# Altium PCB 推挽Max.PcbDoc
Units mil, origin at the board's own origin, x right, y up, seen from the top; angles counter-clockwise.
Board outline 5085 x 1741 mil, 2 copper layers (Top Layer, Bottom Layer); 48 components, 41 nets, 194 pads, 16 vias.
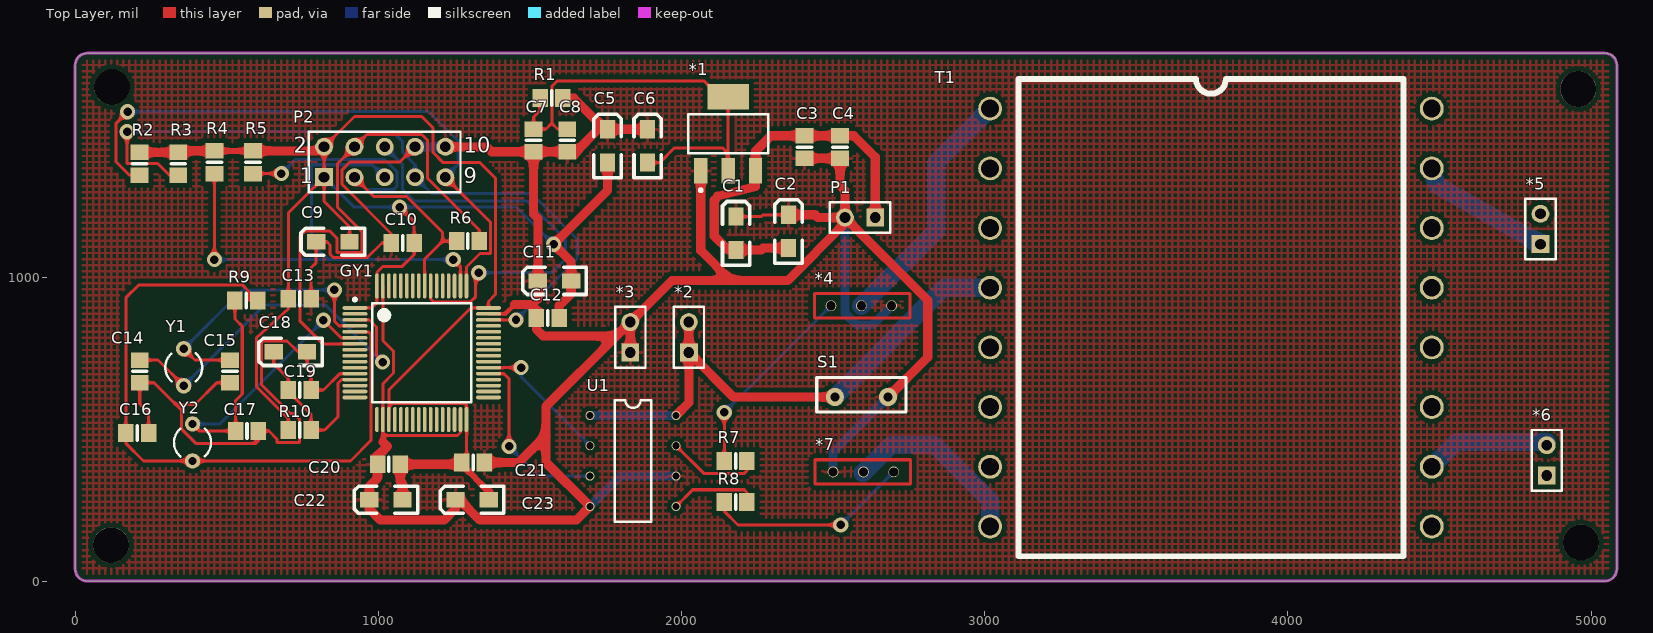
[diagram p0: Top Layer view]
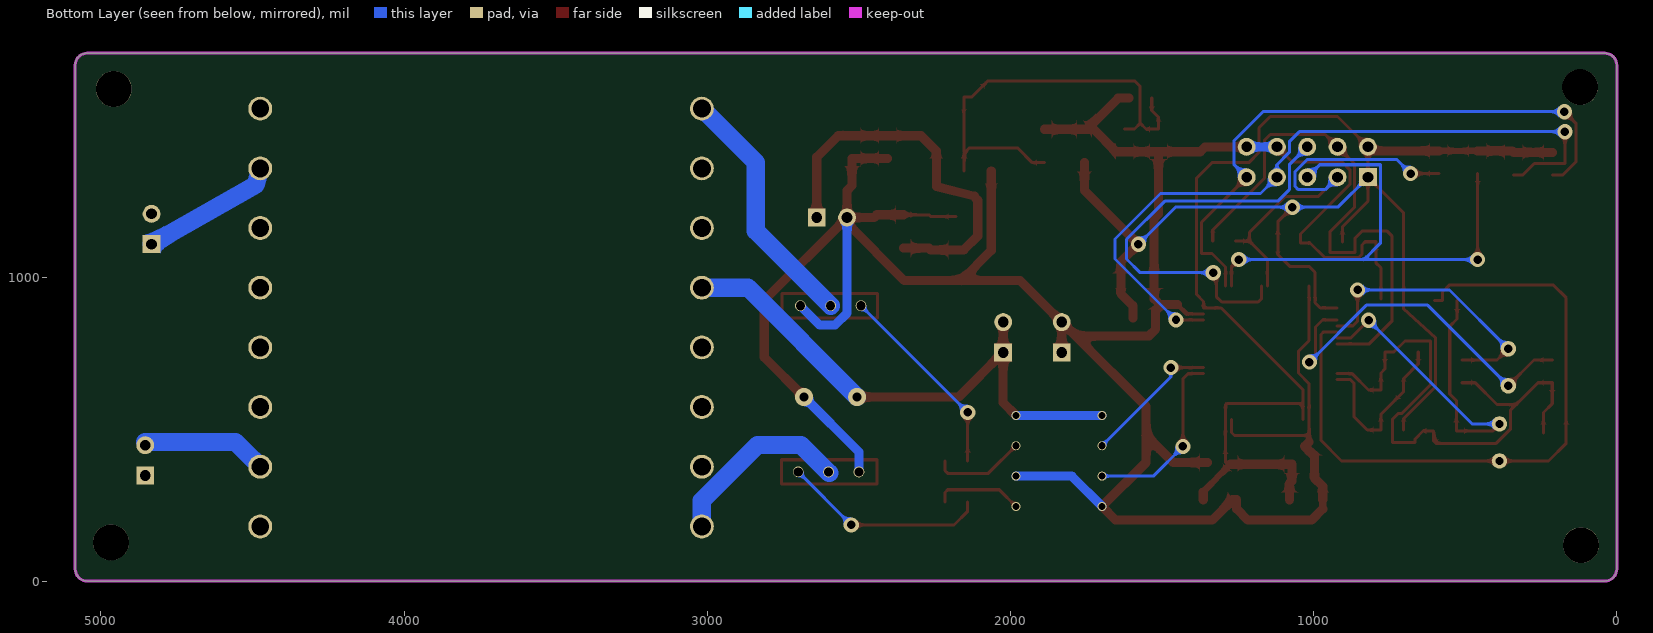
[diagram p1: Bottom Layer view, seen from below]

## Layer stack, top to bottom
Top Solder: solder mask 0.4, Solder Resist, Dk 3.5
Top Layer: signal copper 1.4
Dielectric 1: dielectric 12.6, FR-4, Dk 4.8
Bottom Layer: signal copper 1.4
Bottom Solder: solder mask 0.4, Solder Resist, Dk 3.5

## Board outline
0,39.37 ccw(c39.37,39.37) 39.37,0 5045.63,0 ccw(c5045.63,39.37) 5085,39.37 5085,1701.61 ccw(c5045.62,1701.62) 5045.63,1741 39.37,1741 ccw(c39.38,1701.62) 0,1701.61

## Design rules (kind name [scope] priority, off if disabled: settings)
Clearance poly [inPolygon] p1: gap=15
Clearance [All] p2: gap=6
PolygonConnect Via [isVia] p1: connectstyle=Direct reliefconductorwidth=10 reliefentries=4 polygonreliefangle="90 Angle" airgapwidth=10
PolygonConnect [All] p2: connectstyle=Relief reliefconductorwidth=10 reliefentries=4 polygonreliefangle="90 Angle" airgapwidth=10
RoomDefinition aaa [InComponentClass('aaa')] p1: confinementstyle=ConfineIn formatcopy=TRUE lockcomponents=FALSE outline -69961,-36858 -67961,-36858 -67961,-35858 -69961,-35858
RoutingVias [All] p1: holewidth=28 width=50 viastyle="Through Hole" minholewidth=28 minwidth=50 maxholewidth=28 maxwidth=50
SolderMaskExpansion [All] p1: expansion=2.5
Width [All] p1: maxlimit=10 minlimit=7 preferedwidth=10
30 further rules are at their usual default settings.

## Components (designator, comment, footprint, x,y, rotation, side; value= is the part's Value field where it differs from the comment)
*1 "LM1117" sot223 2154,1475 r0 top
*2 "Component_1" HDR1X2 2024,754 r90 top
*3 "Component_1" HDR1X2 1831,754 r90 top
*4 "MOS" PCBComponent_1 52293,50758 r0 top
*5 "Component_1" HDR1X2 4833,1111 r90 top
*6 "Component_1" HDR1X2 4854,348 r90 top
*7 "MOS" PCBComponent_1 -47100,-49490 r180 top
C1 "Cap Pol2" 3216 2180,1202 r90 top
C2 "Cap Pol2" 3216 2353,1208 r90 top
C3 "Cap Semi" 2012 2405,1394 r90 top
C4 "Cap Semi" 2012 2523,1394 r90 top
C5 "Cap Pol2" 3216 1756,1490 r90 top
C6 "Cap Pol2" 3216 1888,1490 r90 top
C7 "Cap Semi" 2012 1512,1416 r90 top
C8 "Cap Semi" 2012 1623,1416 r90 top
C9 "Cap Pol2" 3216 795,1119 r180 top
C10 "Cap Semi" 2012 1118,1115 r180 top
C11 "Cap Pol2" 3216 1526,990 r180 top
C12 "Cap Semi" 2012 1596,867 r180 top
C13 "Cap" 2012 778,931 r180 top
C14 "Cap" 2012 213,654 r90 top
C15 "Cap" 2012 510,654 r90 top
C16 "Cap" 2012 242,488 r180 top
C17 "Cap" 2012 604,495 r180 top
C18 "Cap" 3216 655,756 r180 top
C19 "Cap" 2012 778,630 r180 top
C20 "Cap Semi" 2012 1072,385 r180 top
C21 "Cap Semi" 2012 1275,391 r0 top
C22 "Cap Pol2" 3216 970,268 r180 top
C23 "Cap Pol2" 3216 1254,268 r180 top
GY1 "STM32F103RC" LQFP64_M 1143,753 r0 top
P1 "Header 2" HDR1X2 2639,1199 r180 top
P2 "JTAG" HDR2X5 821,1332 r0 top
R1 "Res2" 2012 1534,1593 r0 top
R2 "Res2" 2012 212,1339 r90 top
R3 "Res2" 2012 340,1339 r90 top
R4 "Res2" 2012 459,1344 r90 top
R5 "Res2" 2012 587,1344 r90 top
R6 "Res2" 2012 1258,1121 r0 top
R7 "Res2" 2012 2141,396 r0 top
R8 "Res2" 2012 2141,260 r0 top
R9 "Res2" 2012 527,925 r0 top
R10 "Res2" 2012 778,498 r180 top
S1 "SORCE" ddd2 2591,617 r0 top
T1 "Trans CT" bby 3018,1558 r0 top
U1 "IR2101" IR2101 1698,546 r0 top
Y1 "32.768K" R38 358,705 r0 top
Y2 "8MHZ" R38 387,457 r0 top

## Footprints (in the part's own frame and the unit in brackets; to place one, negate y for a bottom-side part, rotate by r counter-clockwise, add the part's x,y. Pads: shape width x height; smd on the part's side, far side on the other; paste and mask are expansions set on the pad)
2012 [mm]
  rect 1.3x1.5 smd: 1(0,0) 2(1.9,0)
  silkscreen extent 0.95,-0.6 0.95,0.6
3216 [mil]
  rect 60x50 smd: 1(0,0) 2(-110,0)
  silkscreen extent -160,-45 50,45
bby [mm]
  round 2 hole 1.5: 1(0,0) 2(0,-5) 3(0,-10) 4(0,-15) 5(0,-20) 6(0,-25) 7(0,-30) 8(0,-35) 9(37,-35) 10(37,-30) 11(37,-25) 12(37,-20) 13(37,-15) 14(37,-10) 15(37,-5) 16(37,0)
  silkscreen extent 2.39,-37.5 34.62,2.5
ddd2 [mil]
  round 60 hole 30: 1(-85,-10) 2(90,-10)
  silkscreen extent -145,-60 150,55
HDR1X2 [mm] "Connector; Header; 2 Position"
  rect 1.5x1.5 hole 0.9: 1(0,0)
  round 1.5 hole 0.9: 2(2.54,0)
  silkscreen extent -1.27,-1.27 3.81,1.27
HDR2X5 [mm] "Connector; Header; 5x2 Position"
  rect 1.5x1.5 hole 0.9: 1(0,0)
  round 1.5 hole 0.9: 2(0,2.54) 3(2.54,0) 4(2.54,2.54) 5(5.08,0) 6(5.08,2.54) 7(7.62,0) 8(7.62,2.54) 9(10.16,0) 10(10.16,2.54)
  silkscreen extent -1.27,-1.27 11.43,3.81
IR2101 [mm]
  round 0.75 hole 0.6: 1(0,0) 2(0,-2.54) 3(0,-5.08) 4(0,-7.62) 5(7.21,-7.62) 6(7.21,-5.08) 7(7.21,-2.54) 8(7.21,0)
  silkscreen extent 2.08,-8.89 5.13,1.27
LQFP64_M [mm]
  oval 2.1x0.3 smd: 1(-5.6,3.75) 2(-5.6,3.25) 3(-5.6,2.75) 4(-5.6,2.25) 5(-5.6,1.75) 6(-5.6,1.25) 7(-5.6,0.75) 8(-5.6,0.25) 9(-5.6,-0.25) 10(-5.6,-0.75) 11(-5.6,-1.25) 12(-5.6,-1.75) 13(-5.6,-2.25) 14(-5.6,-2.75) 15(-5.6,-3.25) 16(-5.6,-3.75) 33(5.6,-3.75) 34(5.6,-3.25) 35(5.6,-2.75) 36(5.6,-2.25) 37(5.6,-1.75) 38(5.6,-1.25) 39(5.6,-0.75) 40(5.6,-0.25) 41(5.6,0.25) 42(5.6,0.75) 43(5.6,1.25) 44(5.6,1.75) 45(5.6,2.25) 46(5.6,2.75) 47(5.6,3.25) 48(5.6,3.75)
  oval 0.3x2.1 smd: 17(-3.75,-5.6) 18(-3.25,-5.6) 19(-2.75,-5.6) 20(-2.25,-5.6) 21(-1.75,-5.6) 22(-1.25,-5.6) 23(-0.75,-5.6) 24(-0.25,-5.6) 25(0.25,-5.6) 26(0.75,-5.6) 27(1.25,-5.6) 28(1.75,-5.6) 29(2.25,-5.6) 30(2.75,-5.6) 31(3.25,-5.6) 32(3.75,-5.6) 49(3.75,5.6) 50(3.25,5.6) 51(2.75,5.6) 52(2.25,5.6) 53(1.75,5.6) 54(1.25,5.6) 55(0.75,5.6) 56(0.25,5.6) 57(-0.25,5.6) 58(-0.75,5.6) 59(-1.25,5.6) 60(-1.75,5.6) 61(-2.25,5.6) 62(-2.75,5.6) 63(-3.25,5.6) 64(-3.75,5.6)
  silkscreen extent -5.72,-4.15 4.15,4.57
PCBComponent_1 [mm]
  round 0.9 hole 0.762: 1(-1264.92,-1266.19)
  round 0.91 hole 0.762: 2(-1262.38,-1266.19) 3(-1259.84,-1266.19)
  Top Layer lines w0.254: -1266.317,-1267.206 -1258.316,-1267.206 -1258.316,-1265.174 -1266.317,-1265.174 -1266.317,-1267.206
R38 [mm] "Crystal, Thru-Hole; 2 Leads; Body 3.1 x 8.2 mm (Dia.xH)"
  round 1.3 hole 0.7: 1(0,1.55) 2(0,-1.55)
  silkscreen extent -1.55,-1.19 1.55,1.17
sot223 [mm]
  rect 1.1x2.15 smd: 1(-2.3,-3.1) 2(0,-3.1) 3(2.3,-3.1)
  rect 3.5x2.15 smd: 4(0,3.1)
  silkscreen extent -3.35,-4.85 3.35,1.62

## Part data
C1 C2 C5 C6 C9 C11 C22 C23: "Polarized Capacitor (Axial)"
C3 C4 C7 C8 C10 C12 C20 C21: "Capacitor (Semiconductor SIM Model)"
C13 C14 C15 C16 C17 C18 C19: "Capacitor"
P1: "Header, 2-Pin"
P2: library part "Header 5X2", "Header, 5-Pin, Dual row"
R1 R2 R3 R4 R5 R6 R7 R8 R9 R10: "Resistor"
T1: "Center-Tapped Transformer (Coupled Inductor Model)"
Y1 Y2: library part XTAL, "Crystal Oscillator"

## Free pads (board coordinates)
  round 118.11 hole 118.11 unplated: 2(118.11,118.11) 2(121,1629) 2(4957.89,1622.89) 2(4966.89,127.11)

## Via types
v1: diameter 50, hole 28, Top Layer to Bottom Layer, 16 vias

## Nets (pads, with @x,y where several pads share a name; then routed paths per layer and width w, separated by ;. In a path a pad name is that pad's centre, name@x,y a point inside that pad or via, vN(x,y) a via of type N, cw(c..) or ccw(c..) an arc to the next point about the centre after c; other vN are vias at no path point)
15V: *2.1 *2.2 S1.1 T1.4 U1.1 U1.8 | length 1813.5
  Top Layer w30: U1.8 2024,588.14 *2.1 ; *2.2 *2.1 ; S1.1 2171,607 *2.1
  Bottom Layer w30: U1.1 U1.8
  Bottom Layer w60: S1.1 2866.45,967.45 T1.4
BOOT0: GY1.60
BOOT1: GY1.28
GND: *1.1 *3.1 *3.2 *4.3 *7.3 C1.1 C2.1 C3.1 C4.1 C5.1 C6.1 C7.1 C8.1 C9.1 C10.2 C11.1 C12.2 C13.1 C20.2 C21.2 C22.1 C23.1 GY1.18 GY1.31 GY1.47 GY1.63 P1.2 P2.8 P2.10 R1.2 S1.2 U1.4 U1.6 | length 10048.1
  Top Layer w10: C13.1 778,1033 795,1050 C9.1 830,1119 840.67,1108.33 840.67,1078 851.67,1067 963.74,1067 1011.74,1115 C10.2 1043.2,1144.8 880.47,1307.53 880.47,1356.47 906,1382 1071,1382 P2.8 ; 1015.05,458.95 GY1.18 1015.05,650.95 1050,685.9 1050,758 1015.05,792.95 GY1.63 ; 1015.05,480 1261,480 1270.95,489.95 GY1.31 ; GY1.47 1418.66,880.95 ; C1.1 2263,1202 2269,1208 C2.1 ; P1.2@2539,1180 P1.2
  Top Layer w15: 1418.66,880.95 1449.7,912
  Top Layer w20: 970,238 C22.1
  Top Layer w30: 970,238 1007,201 1217,201 1254,238 C23.1 1268,268 1335,201 1653,201 U1.4 1553,391 1553,481 ; C22.1 970,312 997.2,339.2 C20.2 997.2,412.24 1029.48,444.52 1015.05,458.95 ; P2.10 1358,1432 1374,1416 C7.1 ; C21.2 1463,391 1553,481 ; 1449.7,912 1501,912 1521.2,891.8 C12.2 1521.2,830.8 1543,809 1784.75,807.75 ; 1502.1,906.9 1526,930.8 C11.1 1526,1196 1512,1210 C7.1 ; R1.2 1645,1593 1749,1489 C5.1@1764,1489 ; *3.1 *3.2 ; C6.1 C5.1 1726,1490 1652,1416 C8.1 C7.1 ; *1.1 2063.45,1090.55 2163,991 ; C2.1 2441,1208 2450,1199 P1.2 ; C3.1 C4.1 2523,1304 2539,1288 P1.2 ; P1.2@2539,1180 2350,991 2163,991 ; S1.2 2812,738 2812,926 P1.2 ; 1553,481 1553,576 1784.75,807.75 ; 1784.75,807.75 *3.2 ; *3.2 1968,991 2163,991
  Bottom Layer w30: P2.8 P2.10 ; U1.4 1798,346 U1.6 ; *7.3 2500,426 S1.2 ; P1.2 2539,884 2579,844 2629,844 *4.3
IN1: *4.1 R7.1 | length 657.8
  Top Layer w10: R7.1 v1(2141,556)
  Bottom Layer w10: v1(2141,556) *4.1
IN2: *7.1 R8.1 | length 680.1
  Top Layer w10: R8.1 2141,230 2186,185 v1(2525,185)
  Bottom Layer w10: v1(2525,185) *7.1
JNTRST: GY1.56 P2.3 R5.1 R6.1 | length 1334.5
  Top Layer w10: R5.1 v1(680,1344) ; P2.3 984,1269 1093,1269 1211.84,1150.16 1211.84,1121 ; GY1.56 1152.84,1062 1211.84,1121 ; R6.1 1211.84,1121
  Bottom Layer w10: v1(680,1344) 727,1391 1020.53,1391 1061.53,1350 1061.53,1302 1050.53,1291 962,1291 P2.3
JTCK: GY1.49 P2.9 R2.1 | length 2016.5
  Top Layer w10: v1(173,1548) 135,1510 135,1382 178,1339 R2.1 ; P2.9 1370,1183 1370,1080 1335,1080 1290.64,1035.64 GY1.49
  Bottom Layer w10: v1(173,1548) 1167,1548 1262,1453 1262,1373 P2.9
JTD0: GY1.55 P2.6 | length 1426.4
  Top Layer w10: GY1.55 1172.53,930.47 1183,920 1303,920 1321,938 1321,1007 v1(1331,1017)
  Bottom Layer w10: P2.6 1080,1373 1080,1291 1118,1253 1491,1253 1617,1127 1617,1062 1572,1017 v1(1331,1017)
JTD1: GY1.50 P2.5 R4.1 | length 1761.8
  Top Layer w10: v1(459,1060) R4.1 ; v1(1247,1060) 1270.95,1036.05 GY1.50
  Bottom Layer w10: v1(459,1060) 834,1060 ; P2.5 980,1373 780,1373 780,1114 834,1060 ; v1(1247,1060) 834,1060
JTMS: GY1.46 P2.7 R3.1 | length 2405.6
  Top Layer w10: v1(171,1482) 171,1377 272,1377 310,1339 R3.1 ; GY1.46 v1(1454,861.27)
  Bottom Layer w10: v1(171,1482) 1047,1482 1080,1449 1080,1414 1121,1373 P2.7 1175,1278 1505.27,1278 1655,1128.27 1655,1062.27 v1(1454,861.27)
Net*1_2: *1.2 *1.4 C6.2 C7.2 C8.2 R1.1 | length 1567.8
  Top Layer w10: R1.1 1534,1552 1512,1530 C7.2 1552.8,1490.8 1572,1510 ; C8.2 1591,1490.8 1572,1509.8 1572,1510 ; C6.2 1928,1380 1977,1429 2135,1429 2151,1413 ; 1572,1510 1572,1631 1591,1650 2074.05,1650 2127,1597.05 *1.4 2154,1416 2151,1413 ; 2151,1413 2154,1410 *1.2 2151,1413
Net*4_2: *4.2 T1.1 | length 826
  Bottom Layer w60: *4.2 2840,1155 2840,1380 T1.1
Net*5_1: *5.1 T1.15 | length 451.7
  Bottom Layer w60: T1.15 4489.99,1306.14 *5.1@4833.61,1112.08
Net*6_2: *6.2 T1.10 | length 417.1
  Bottom Layer w10: T1.10@4461.57,399.51 T1.10@4497.3,399.51
  Bottom Layer w60: T1.10@4497.3,399.51 4556.79,459 *6.2@4854,459
Net*7_2: *7.2 T1.8 | length 619.7
  Bottom Layer w60: *7.2@2598,356 2691,449 2834,449 3018,265 T1.8
NetC14_1: C14.1 C15.1 C16.1 C17.1 C18.2 C19.1 GY1.12 | length 1990.7
  Top Layer w10: C16.1 242,556 213,585 C14.1 260,654 332,582 ; C15.1 467,654 395,582 332,582 ; GY1.12 873.1,684.1 819,630 C19.1 778,686 765,699 C18.2 735,756 699,792 614,792 614,648 710,552 722,552 740,534 740,457 666,457 666,468 639,495 C17.1 ; 332,582 350,564 350,502 398,454 596,454 ; 596,454 604,462 C17.1 ; 596,454 C17.1
NetC18_1: C18.1 C19.2 GY1.13 R10.1 | length 587.1
  Top Layer w10: C18.1 655,716.2 703.2,668 C19.2 703.2,624.8 778,550 R10.1 823,498 867.56,542.56 867.56,652.98 879,664.42 GY1.13
NetR7_2: R7.2 U1.7 | length 307.5
  Top Layer w10: U1.7 2072.86,355 2207,355 2215.8,363.8 R7.2
NetR8_2: R8.2 U1.5 | length 292.6
  Top Layer w10: U1.5 2036.86,301 2207,301 2215.8,292.2 R8.2
PA0: GY1.14
PA1: GY1.15
PB5: GY1.57
PB6: GY1.58
PB7: GY1.59
PB8: GY1.61
PB9: GY1.62
PC6: GY1.37 U1.3 | length 605.3
  Top Layer w10: GY1.37 1414.1,684.1 1431,667.2 v1(1431,444)
  Bottom Layer w10: v1(1431,444) 1529,346 U1.3
PC7: GY1.38 U1.2 | length 459.3
  Top Layer w10: GY1.38 v1(1471,703.79)
  Bottom Layer w10: v1(1471,703.79) 1471,673 U1.2
PC10: GY1.51
PC11: GY1.52
PC12: GY1.53
PC13: GY1.2
PC14: C14.2 GY1.3 Y1.2 | length 1229.6
  Top Layer w10: C14.2 273.17,728.8 Y1.2 ; GY1.3 970.73,861.27 994,838 994,742 v1(1014,722)
  Bottom Layer w10: Y1.2 624.02,910 826,910 v1(1014,722)
PC15: C15.2 GY1.4 Y1.1 | length 921.9
  Top Layer w10: Y1.1 395.22,728.8 C15.2 ; v1(855,960) 855,856.58 870,841.58 GY1.4
  Bottom Layer w10: Y1.1 551.98,960 v1(855,960)
PD0: C16.2 GY1.5 R9.2 Y2.2 | length 2237.5
  Top Layer w10: R9.2 575,925 575,953 551,977 210.2,977 167.2,934 C16.2 167.2,454 225.22,395.98 Y2.2 907.98,395.98 976,464 976,812.9 967,821.9 GY1.5
PD1: C17.2 GY1.6 R9.1 Y2.1 | length 1302
  Top Layer w10: Y2.1 410.02,495 C17.2 529.2,595.2 551,617 551,840 527,864 R9.1 ; v1(819,860.21) 877,802.21 GY1.6
  Bottom Layer w10: Y2.1 476.81,518.02 v1(819,860.21)
PD2: GY1.54
RESET: GY1.7 P2.4 R6.2 | length 1837.3
  Top Layer w10: GY1.7 816.62,782.53 741,858.14 741,1137 759,1155 839,1155 864,1130 864,1083 946,1083 946,1152 864.47,1233.53 864.47,1375.47 P2.4 962,1473 1143,1473 1162,1454 1162,1328.8 1332.8,1158 R6.2
VCC_3.3: C5.2 C9.2 C10.1 C11.2 C12.1 C13.2 C20.1 C21.1 C22.2 C23.2 GY1.1 GY1.19 GY1.32 GY1.48 GY1.64 P2.1 P2.2 R2.2 R3.2 R4.2 R5.2 R10.2 | length 6583.2
  Top Layer w10: R10.2 703.2,535.8 598,641 598,802.59 703.2,897.59 C13.2 703.2,1214.2 P2.1 ; C9.2 905,1168.71 821,1252.71 P2.1 ; GY1.1 978,900.64 995.36,918 GY1.64 995.36,1018.36 1015,1038 1079,1038 1118,1077 C10.1 1118,1185 v1(1070,1233) ; GY1.19 1034.73,574 ; C21.1@1275,385 C21.1 1291,391 1291,492.64 1290.64,493 GY1.32 1290.64,582 1286.54,586.1 1046.83,586.1 1034.73,574 ; GY1.48 GY1.48@1363,900.64 ; P2.1 P2.2 921,1532 1143,1532 1180,1495 1180,1414 1214,1380 1335,1380 1386,1329 1386,945 1363,922 GY1.48@1363,900.64 ; 1034.73,574 1034.73,630.37 1305,900.64 GY1.48@1363,900.64
  Top Layer w20: R4.2 R5.2 ; C21.1@1275,385 1364,294
  Top Layer w30: R2.2 R3.2 345,1418.8 R4.2 ; R5.2 807.8,1418.8 P2.2 ; C22.2 1080,322 1072,330 C20.1 C21.1@1275,385 ; C23.2 1364,294 ; C12.1 1596,908 1636,948 C11.2 1636,1053 v1(1578,1111) 1756,1289 C5.2
  Bottom Layer w10: P2.1 920,1233 v1(1070,1233) 1456,1233 v1(1578,1111)
VCC_5: *1.3 C1.2 C2.2 C3.2 C4.2 P1.1 | length 1293.3
  Top Layer w30: 2108,1256 2108,1138 2154,1092 C1.2 2263,1092 2269,1098 C2.2 ; 2109,1254 2118.03,1269.22 2244.55,1301.52 *1.3 2244.55,1418.36 2295,1468.8 C3.2 C4.2 2568.2,1468.8 2639,1398 P1.1
pads on no net: *5.2 *6.1 GY1.8 GY1.9 GY1.10 GY1.11 GY1.16 GY1.17 GY1.20 GY1.21 GY1.22 GY1.23 GY1.24 GY1.25 GY1.26 GY1.27 GY1.29 GY1.30 GY1.33 GY1.34 GY1.35 GY1.36 GY1.39 GY1.40 GY1.41 GY1.42 GY1.43 GY1.44 GY1.45 T1.2 T1.3 T1.5 T1.6 T1.7 T1.9 T1.11 T1.12 T1.13 T1.14 T1.16

## Polygon pours and split planes (outlines as drawn)
GND on Top Layer "Top Layer-No Net" (hatched 90Degree grid 20 track 8, remove dead copper, pour order 12): 15,1743 23,1735 5057,1735 5057,31 5071,17 5068,14 15,14 15,1724 11,1728

## Keep-outs
Keep-Out Layer:
  the board outline again, w10

## Text inside footprints (layer, text, board x,y; h text height)
P2: Top Overlay "2" at 721,1412 h50; Top Overlay "1" at 741,1312 h50; Top Overlay "9" at 1281,1312 h50; Top Overlay "10" at 1281,1412 h50